# Altium PCB Tarefinha.PcbDoc
Units mil, origin at the board's own origin, x right, y up, seen from the top; angles counter-clockwise.
Board outline 3780 x 3780 mil, 2 copper layers (Top Layer, Bottom Layer); 29 components, 20 nets, 180 pads, 8 vias.
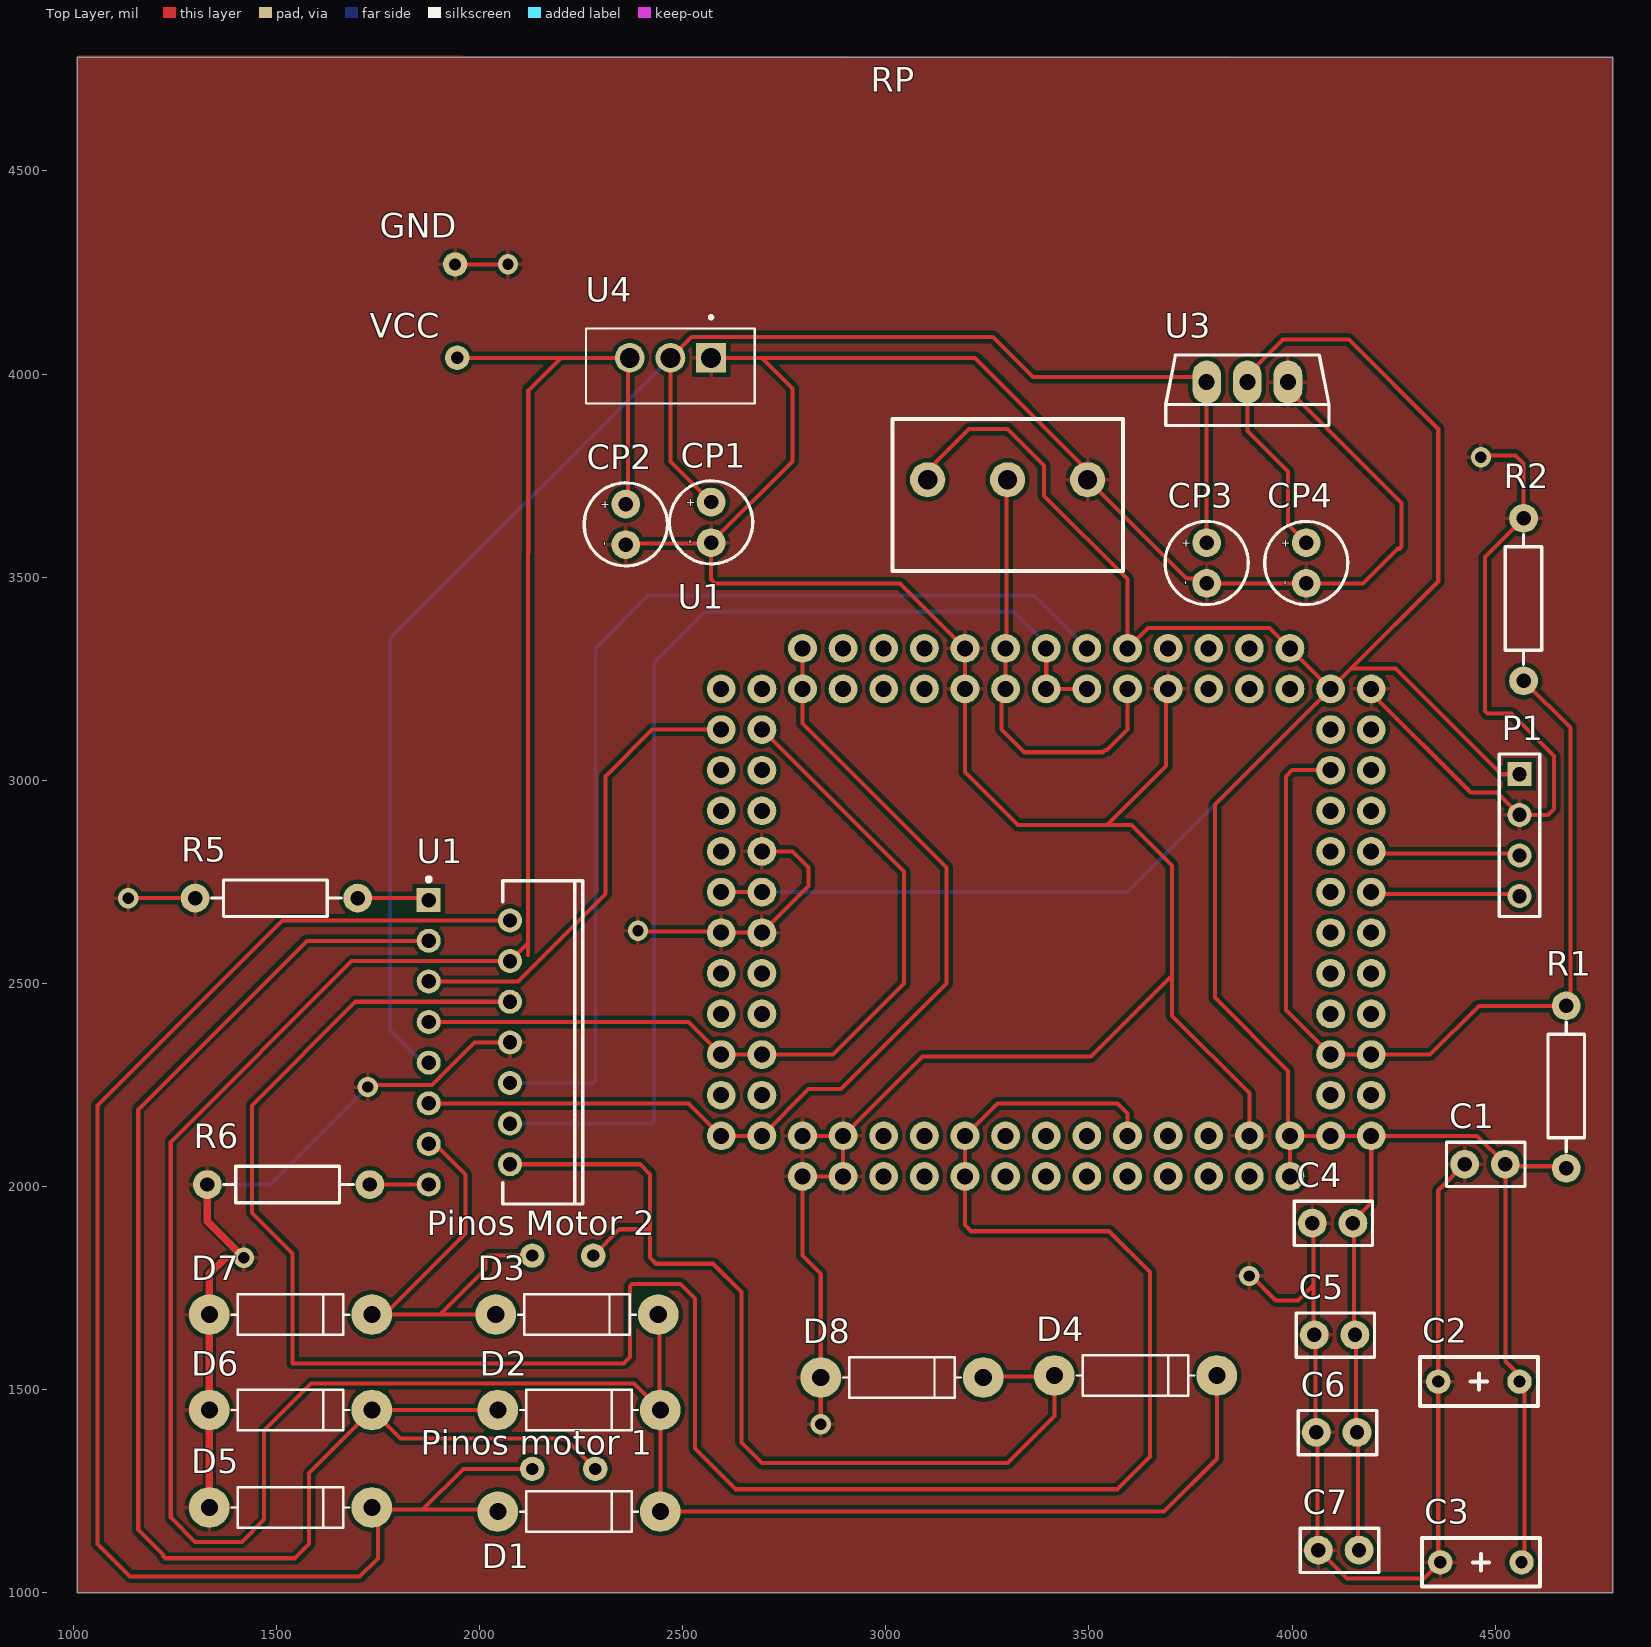
[diagram p0: Top Layer view]
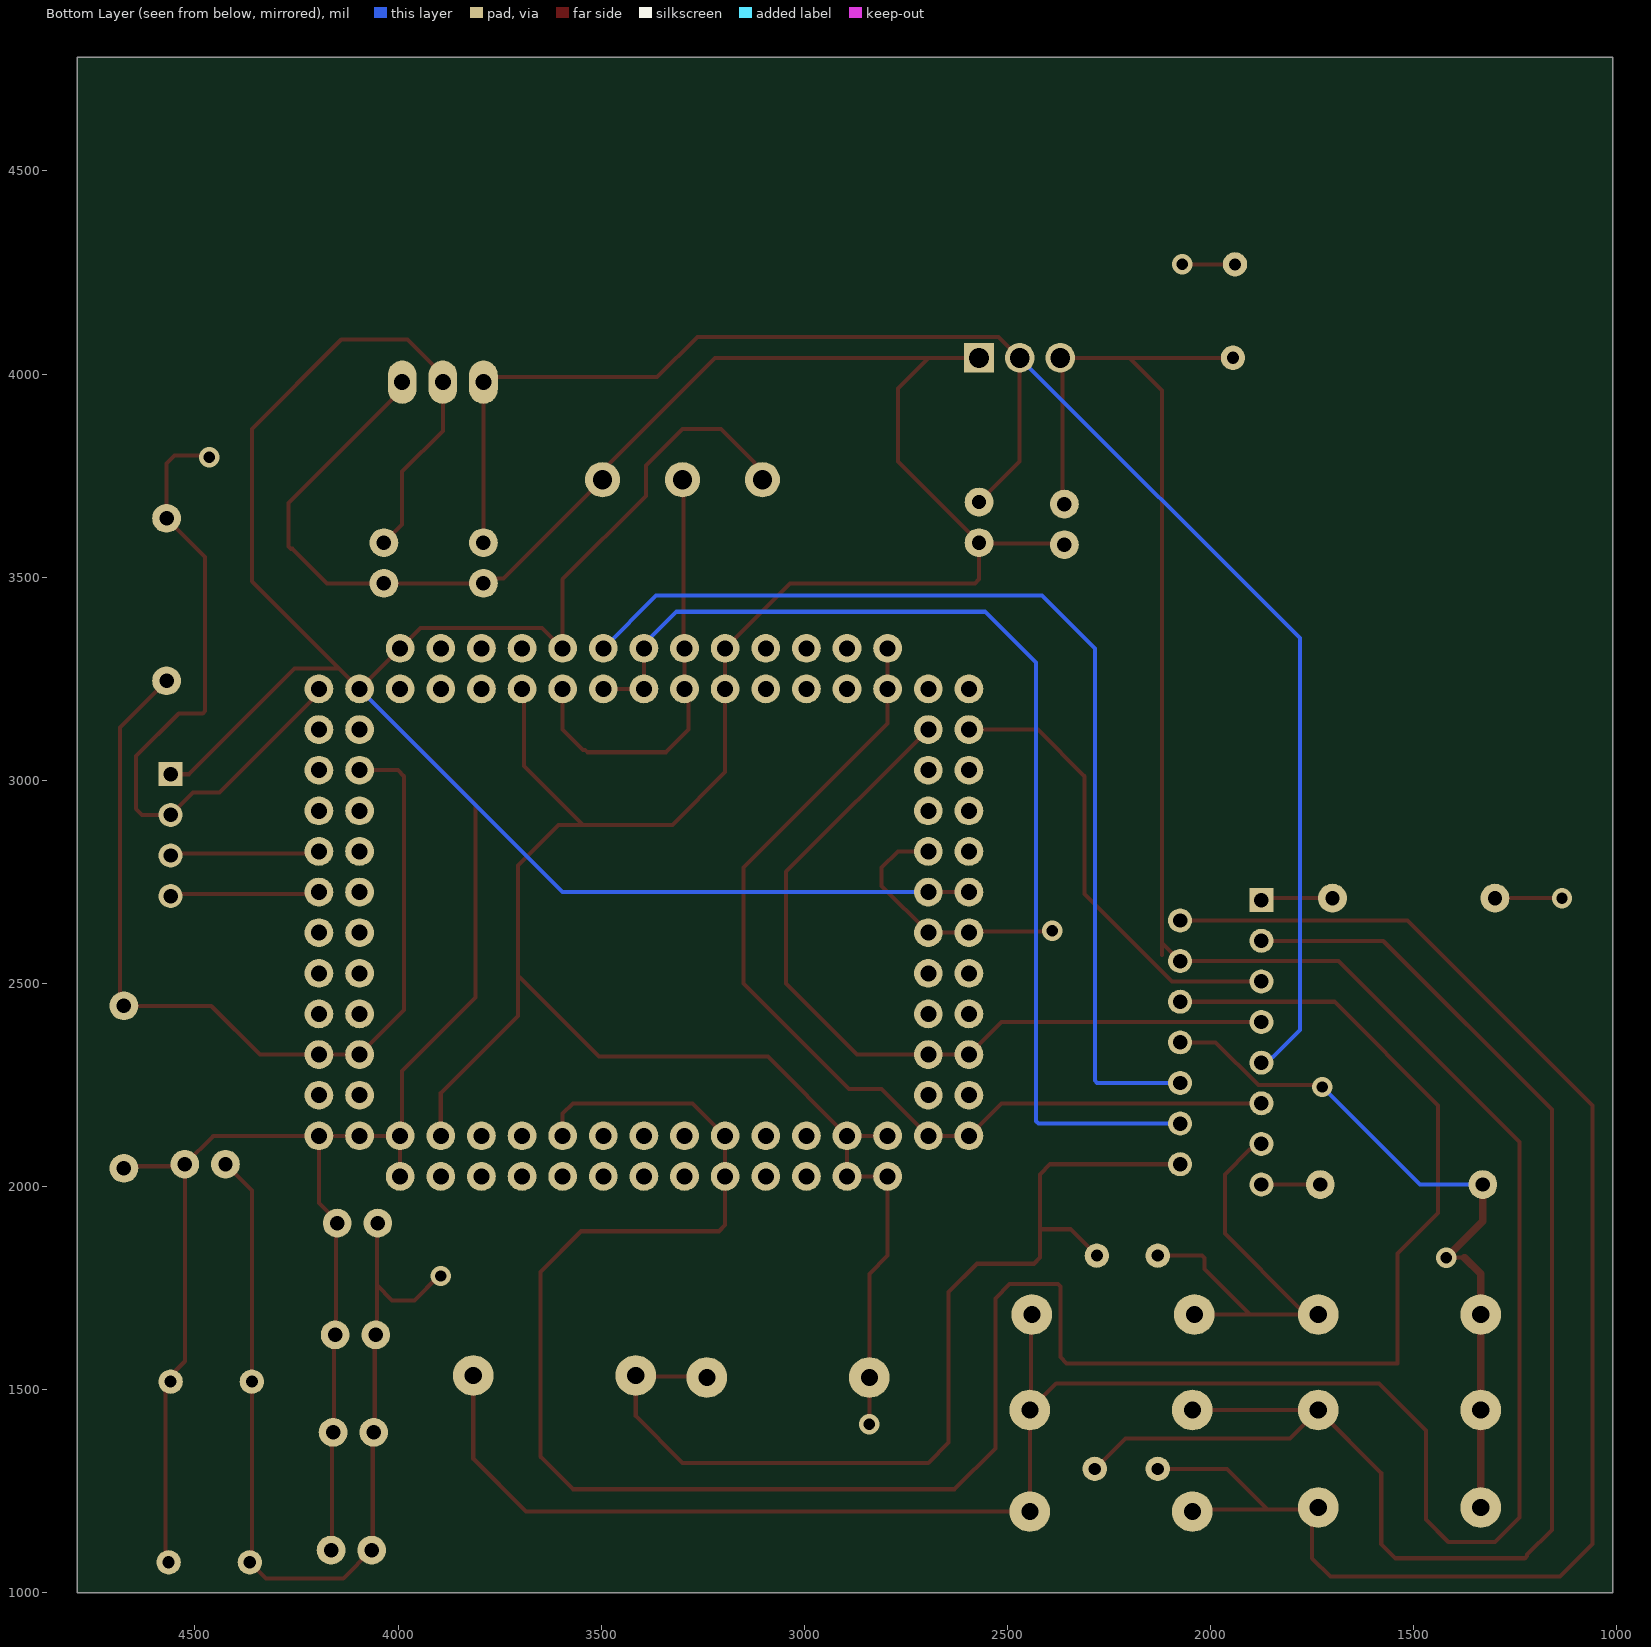
[diagram p1: Bottom Layer view, seen from below]
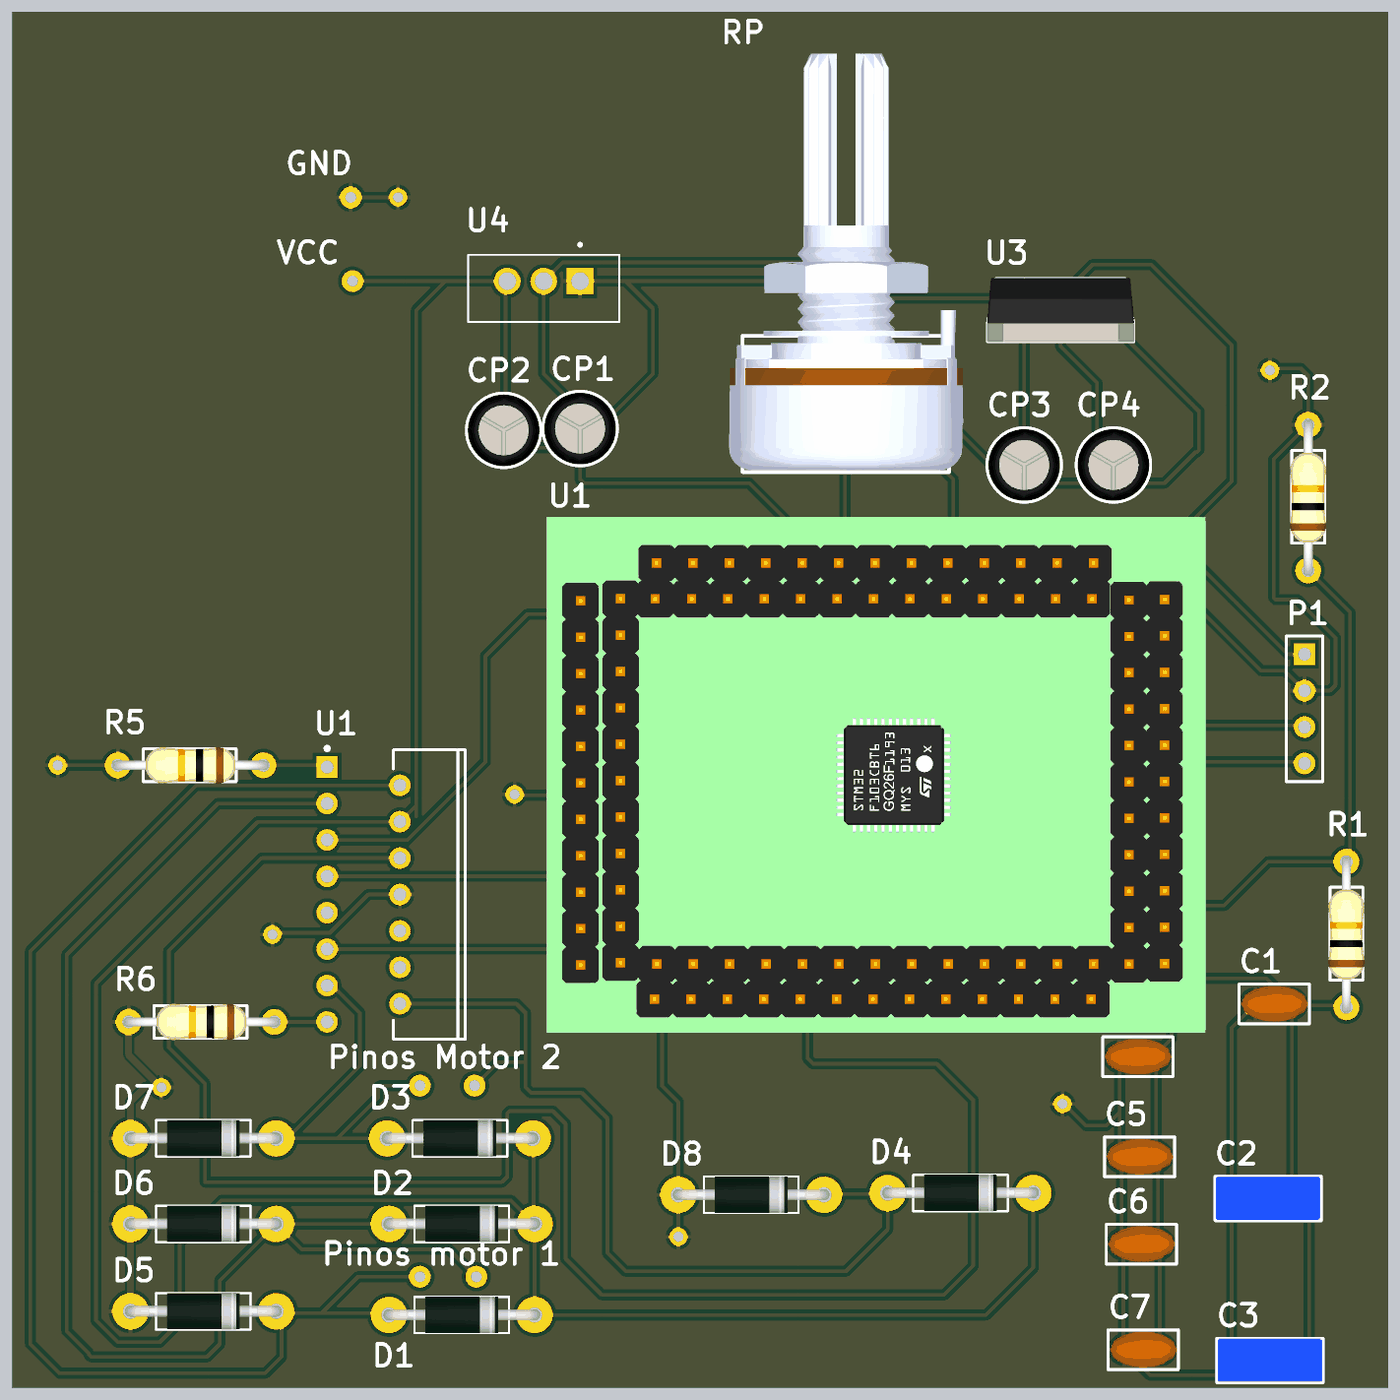
[diagram p2: 3D render of the assembled board from above, using the file's embedded part models]

## Layer stack, top to bottom
Top Solder: solder mask 0.4, Solder Resist, Dk 3.5
Top Layer: signal copper 1.4
Dielectric 1: dielectric 12.6, FR-4, Dk 4.8
Bottom Layer: signal copper 1.4
Bottom Solder: solder mask 0.4, Solder Resist, Dk 3.5

## Board outline
1010,1000 1010,4780 4790,4780 4790,1000

## Design rules (kind name [scope] priority, off if disabled: settings)
Clearance [All] p1: gap=7.87 ignorepadtopadclearanceinfootprint=FALSE except(0: Arc-Hole Track-Hole SMDPad-Hole THPad-Hole Via-Hole Fill-Hole Poly-Hole Region-Hole Text-Hole)
ComponentClearance [All] p1: gap=3.94 collisioncheckmode=3 verticalgap=3.94 showdistances=FALSE
HoleSize [All] p1: absolutevalues=TRUE maxlimit=629.92 minlimit=5.91 maxpercent=80.000 minpercent=20.000
HoleToHoleClearance [All] p1: gap=5 allowstackedmicrovias=TRUE
MinimumAnnularRing [All] p1: minimumring=5.12
MinimumSolderMaskSliver [All] p1: minsoldermaskwidth=5
PolygonConnect [All] p1: connectstyle=Direct reliefconductorwidth=10 reliefentries=4 polygonreliefangle="90 Angle" airgapwidth=10
RoutingVias [All] p1: holewidth=15.75 width=31.5 viastyle="Through Hole" minholewidth=11.81 minwidth=23.62 maxholewidth=19.68 maxwidth=39.37
SilkToSilkClearance [All] p1: silktosilkclearance=0
SilkToSolderMaskClearance [IsPad] p1: minsilkscreentomaskgap=0 clearancetoexposedcopper=TRUE
SolderMaskExpansion [All] p1: expansion=1.5 istentingtop=FALSE
Width [All] p1: maxlimit=39.37 minlimit=11.81 preferedwidth=19.68
24 further rules are at their usual default settings.

## Components (designator, comment, footprint, x,y, rotation, side; value= is the part's Value field where it differs from the comment)
C1 "100nF" "CAP CER DISK 100NF 50V - duplicate" 4475,2055 r0 top
C2 "10 nF" "Cap Film 0.1uF" 4460,1520 r180 top
C3 "1uF" "Cap Film 0.1uF" 4465,1075 r180 top
C4 "4.7uF" "CAP CER DISK 100NF 50V - duplicate" 4100,1910 r0 top
C5 "100nF" "CAP CER DISK 100NF 50V - duplicate" 4105,1635 r0 top
C6 "100nF" "CAP CER DISK 100NF 50V - duplicate" 4110,1395 r0 top
C7 "100nF" "CAP CER DISK 100NF 50V - duplicate" 4115,1105 r0 top
CP1 "10uF" "CAP RAD 10UF 35V" 2570,3635 r270 top
CP2 "10uF" "CAP RAD 10UF 35V" 2360,3630 r270 top
CP3 "10uF" "CAP RAD 10UF 35V" 3790,3535 r270 top
CP4 "10uF" "CAP RAD 10UF 35V" 4035,3535 r270 top
D1 "1n4148" DO-41 2245,1200 r270 top
D2 "1n4148" DO-41 2245,1450 r270 top
D3 "1n4148" DO-41 2240,1685 r270 top
D4 "1n4148" DO-41 3615,1535 r270 top
D5 "1n4148" DO-41 1535,1210 r270 top
D6 "1n4148" DO-41 1535,1450 r270 top
D7 "1n4148" DO-41 1535,1685 r270 top
D8 "1n4148" DO-41 3040,1530 r270 top
P1 "Gravador ST" HDR1X4 4560,3015 r270 top
R1 "0R" "RES 10K 1/4W CARBON FILM" 4675,2245 r90 top
R2 "10K" "RES 10K 1/4W CARBON FILM" 4570,3445 r90 top
R5 "0.5" "RES 10K 1/4W CARBON FILM" 1500,2710 r180 top
R6 "0.5" "RES 10K 1/4W CARBON FILM" 1530,2005 r180 top
RP "Pot 10k" "Pot 10k" 3300,3740 r0 top
U1 "L298N" STM-FM-15 1975,2355 r0 top
U1 "STM32F303CCT6" ADAPTADOR 2795,3225 r270 top
U3 "LM1117-3.3" TO220AB 3890,3980 r180 top
U4 "LM1117I-5.0" TO254P1054X470X1955-3 2470,4040 r180 top

## Footprints (in the part's own frame and the unit in brackets; to place one, negate y for a bottom-side part, rotate by r counter-clockwise, add the part's x,y. Pads: shape width x height; smd on the part's side, far side on the other; paste and mask are expansions set on the pad)
ADAPTADOR [mm] "SMD"
  round 1.8 hole 1: 1(-2.54,30.48) 2(-2.54,2.54) 2(0,30.48) 2(0,2.54) 3(-2.54,27.94) 4(-2.54,5.08) 4(0,27.94) 4(0,5.08) 5(-2.54,25.4) 6(-2.54,7.62) 6(0,25.4) 6(0,7.62) 7(-2.54,22.86) 8(-2.54,10.16) 8(0,22.86) 8(0,10.16) 9(-2.54,20.32) 10(-2.54,12.7) 10(0,20.32) 10(0,12.7) 11(-2.54,17.78) 12(-2.54,15.24) 12(0,17.78) 12(0,15.24) 13(-2.54,0) 13(0,0) 13(27.94,-5.08) 13(27.94,-2.54) 14(0,-5.08) 15(0,-2.54) 15(25.4,-5.08) 15(25.4,-2.54) 16(2.54,-5.08) 17(2.54,-2.54) 17(22.86,-5.08) 17(22.86,-2.54) 18(5.08,-5.08) 19(5.08,-2.54) 19(20.32,-5.08) 19(20.32,-2.54) 20(7.62,-5.08) 21(7.62,-2.54) 21(17.78,-5.08) 21(17.78,-2.54) 22(10.16,-5.08) 23(10.16,-2.54) 23(15.24,-5.08) 23(15.24,-2.54) 24(12.7,-2.54) 24(12.7,-5.08) 25(27.94,15.24) 25(30.48,15.24) 26(30.48,17.78) 27(27.94,17.78) 27(27.94,12.7) 27(30.48,12.7) 28(30.48,20.32) 29(27.94,20.32) 29(27.94,10.16) 29(30.48,10.16) 30(30.48,22.86) 31(27.94,22.86) 31(27.94,7.62) 31(30.48,7.62) 32(30.48,25.4) 33(27.94,25.4) 33(27.94,5.08) 33(30.48,5.08) 34(30.48,27.94) 35(27.94,27.94) 35(27.94,2.54) 35(30.48,2.54) 36(27.94,30.48) 36(30.48,30.48) 37(12.7,35.56) 38(12.7,33.02) 38(15.24,33.02) 38(15.24,35.56) 39(10.16,35.56) 40(10.16,33.02) 40(17.78,33.02) 40(17.78,35.56) 41(7.62,35.56) 42(7.62,33.02) 42(20.32,33.02) 42(20.32,35.56) 43(5.08,35.56) 44(5.08,33.02) 44(22.86,33.02) 44(22.86,35.56) 45(2.54,35.56) 46(2.54,33.02) 46(25.4,33.02) 46(25.4,35.56) 47(0,35.56) 47(27.94,0) 47(30.48,0) 48(0,33.02) 48(27.94,33.02) 48(27.94,35.56)
  body extent -4.24,-8.06 31.76,37.94, height 8.17
"CAP CER DISK 100NF 50V - duplicate" [mm] "Connector; Header; 5 Position"
  round 1.8 hole 0.9: 1(-1.27,0) 2(1.27,0)
  silkscreen extent -2.4,-1.4 2.5,1.37, body extent -2.28,-1.25 2.42,1.25, height 6.1
"Cap Film 0.1uF" [mil] "Cap Film 0.1uF"
  round 60 hole 30: 1(100,0) 2(-100,0)
  silkscreen extent -145,-60 145,60, body extent -144,-60 144,58, height 236
"CAP RAD 10UF 35V" [mm]
  round 1.8 hole 0.9: 1(-1.27,0) 2(1.27,0)
  silkscreen extent -2.6,-2.6 2.6,2.6, body extent -2.5,-2.5 2.5,2.5, height 12.2
DO-41 [mil] "Diode, thru-hole"
  round 100 / inner round 0 / far side round 100 hole 42: 1(0,-200) 2(0,200)
  silkscreen extent -50,-145 50,145, body extent -51,-215 50,215, height 100
HDR1X4 [mm]
  rect 1.5x1.5 hole 0.9: 1(0,0)
  round 1.5 hole 0.9: 2(2.54,0) 3(5.08,0) 4(7.62,0)
  silkscreen extent -1.27,-1.27 8.89,1.27
"Pot 10k" [mm]
  round 2.2 hole 1.2: 1(-5,0) 2(0,0) 3(5,0)
  silkscreen extent -7.2,-5.7 7.2,3.8, body extent -8.15,-5.55 8.19,23.49, height 21.17
"RES 10K 1/4W CARBON FILM" [mm]
  round 1.8 hole 0.9: 1(-5.08,0) 2(5.08,0)
  silkscreen extent -4.06,-1.14 4.06,1.14, body extent -5.47,-1.27 5.47,1.27, height 3.27
STM-FM-15 [mm] "FM, 15-Leads, Body 20.2x5mm, Pitch 1.27mm"
  rect 1.5x1.5 hole 0.9: 1(-2.54,8.89)
  round 1.5 hole 0.9: 2(2.54,7.62) 3(-2.54,6.35) 4(2.54,5.08) 5(-2.54,3.81) 6(2.54,2.54) 7(-2.54,1.27) 8(2.54,0) 9(-2.54,-1.27) 10(2.54,-2.54) 11(-2.54,-3.81) 12(2.54,-5.08) 13(-2.54,-6.35) 14(2.54,-7.62) 15(-2.54,-8.89)
  silkscreen extent -2.66,-10.1 7.09,10.31, body extent -2.8,-10.1 7.09,10.1, height 21
TO220AB [mm]
  oval 1.8x2.7 hole 1: 1(-2.54,0) 2(0,0) 3(2.54,0)
  silkscreen extent -5.1,-1.7 5.1,2.7, body extent -5.15,-1.78 5.15,2.73, height 19.34
TO254P1054X470X1955-3 [mm]
  rect 1.86x1.86 hole 1.24: 1(-2.54,0)
  round 1.86 hole 1.24: 2(0,0) 3(2.54,0)
  silkscreen extent -5.27,-2.64 5.27,2.86

## Part data
C1 C5 C6 C7: library part "Capacitor 100nF - 25V", "CAP CER 0.1UF 25V Y5V 0603", Capacitance=0.1µF, Capacitance Tolerance="+80%, -20%", Capacitor Case Style="0603 ^1608 Metric]", Capacitor Terminals=SMD, Dielectric Characteristic=Y5V, Manufacturer=KEMET, Manufacturer Part Number=C0603C104Z3VACTU, Operating Temperature Range="-30°C to +85°C", Supplier Part Number 1=80-C0603C104Z3V, Voltage Rating=25V, ComponentLink1Description=http://www.farnell.com/datasheets/1470417.pdf, ComponentLink1URL=http://www.farnell.com/datasheets/1470417.pdf, ComponentLink2Description=http://www.farnell.com/datasheets/1828802.pdf, ComponentLink2URL=http://www.farnell.com/datasheets/1828802.pdf, ComponentLink3Description=http://www.alliedelec.com/m/d/9bfe7773041ffe9d406e68bc7b377fdd.pdf, ComponentLink3URL=http://www.alliedelec.com/m/d/9bfe7773041ffe9d406e68bc7b377fdd.pdf, Pricing 1="1=0.1, 10=0.015, 50=0.015, 100=0.011, 1000=0.007, 10000=0.005 (USD)", Stock 1=1512660, Supplier 1=Mouser
C2: library part "Capacitor 10 uF", "MURATA         ZRB18AR61E106ME01L             SMD Multilayer Ceramic Capacitor, 0603 [1608 Metric], 10 F, 25 V,  20%, X5R, ZRA Series", Capacitance=10µF, Manufacturer=Murata, Manufacturer Part Number=ZRB18AR61E106ME01L, Operating Temperature="-55°C ~ 85°C", Package / Case="0603 (1608 Metric)", Ratings=-, Supplier Part Number 1=490-10991-1-ND, Temperature Coefficient=X5R, Tolerance=±20%, Voltage - Rated=25V, Applications="Acoustic Noise Reduction", Category=Capacitors, Family="Ceramic Capacitors", Features="Interposer Termination", Height - Seated (Max)=-, Lead Spacing=-, Lead Style=-, Mounting Type="Surface Mount, MLCC", Packaging="Tape & Reel (TR)", Pricing 1="1=0.63, 10=0.446, 100=0.2934, 500=0.2174, 1000=0.1848 (USD)", Series=ZRB, Size / Dimension="0.063\" L x 0.031\" W (1.60mm x 0.80mm)", Stock 1=30000, Supplier 1=Digi-Key, Thickness (Max)="0.047\" (1.20mm)"
C3: library part "Capacitor 1uF", Manufacturer=Rohm, Manufacturer Part Number=TCM1E105M8R, Supplier Part Number 1=755-TCM1E105M8R, Pricing 1="1=0.39, 10=0.247, 50=0.247, 100=0.106, 1000=0.082, 10000=0.055 (USD)", Stock 1=8000, Supplier 1=Mouser
C4: library part "Capacitor 4.7uF", "CAP CER 4.7UF 35V X5R 0603", Capacitance=4.7µF, Manufacturer=TDK, Manufacturer Part Number=C1608X5R1V475K080AC, Operating Temperature="-55°C ~ 85°C", Package / Case="0603 (1608 Metric)", PCN Part Number="MLCC Part Number Change 30/Nov/2012", Ratings=-, Standard Package=1, Supplier Part Number 1=445-9064-1-ND, Temperature Coefficient=X5R, Tolerance=±10%, Voltage - Rated=35V, Applications="General Purpose", Category=Capacitors, ComponentLink1Description=http://www.mouser.com/ds/2/400/lcc_commercial_general_en-837201.pdf, ComponentLink1URL=http://www.mouser.com/ds/2/400/lcc_commercial_general_en-837201.pdf, Design Resources="20 W Non-Isolated Buck LED Driver Using PL LNK460KG", Family="Ceramic Capacitors", Features=-, Height - Seated (Max)=-, Kits="445-9014-KIT-ND  - KIT MLCC 100PF-22UF 0603 10-50V", Lead Spacing=-, Lead Style=-, Mounting Type="Surface Mount, MLCC", Online Catalog="C Series, General Purpose", Other Names=445-9064-1, Packaging="Cut Tape (CT)", Pricing 1="1=0.6, 10=0.417, 100=0.2501, 500=0.1876, 1000=0.1584 (USD)", Product Training Modules="SEAT, CCV, and TVCL Design Tools Guide to Replacing an Electrolytic Capacitor with an MLCC", RoHS Information="RoHS Certificate-MLCC", Series=C, Size / Dimension="0.063\" L x 0.031\" W (1.60mm x 0.80mm)", Stock 1=382, Supplier 1=Digi-Key, Thickness (Max)="0.039\" (1.00mm)"
CP1 CP2 CP3 CP4: library part "CAP ELE RAD 10uF 16V", "CAP ELE RAD 10uF 16V", Capacitance Tolerance="± 20%", Capacitor Terminals="Radial Leaded", Leakage Current=6, Lifetime @ Temperature="2000 hours @ 85", Manufacturer=-, Manufacturer Part Number=IMP1295, Operating Temperature Max=85, Operating Temperature Min=-40, Operating Temperature Range="-40°C to +85°C<!--FANDB--><div class=\"features-and-benefits-container\"><div class=\"features-and-benefits-description\"><span class=\"features-benefits-value\">The Multicomp MCGPR series capacitors are general purpose, radial leaded polarized aluminium electrolytic capacitors. MCGPR series parts cover broad range of voltage ratings and capacitance values.</span></div><div class=\"features-and-benefits-list\"><ul class=\"features-and-benefits-list-list\"><li class=\"features-and-benefits-list-item\">Capacitance value ranges from 0.1µF to 22000µF for 6.3VDC to 100VDC</li><li class=\"features-and-benefits-list-item\">Capacitance value ranges from 0.47µF to 820µF for 160VDC to 450VDC</li><li class=\"features-and-benefits-list-item\">Tolerance of ±20%</li><li class=\"features-and-benefits-list-item\">Endurance of 2000h at 85°C</li><li class=\"features-and-benefits-list-item\">Available in -40°C to 85°C and -25°C to 85", Supplier Part Number 1="Capacitor Eletrolítico 10uF/16V", Voltage Rating=16, Capacitance=10uF, Capacitance Tolerance ±="± 20%", ComponentLink1Description=http://loja.multcomercial.com.br/capacitor-eletrolitico-10uf-16v.html, ComponentLink1URL=http://loja.multcomercial.com.br/capacitor-eletrolitico-10uf-16v.html, Diameter=5, ESR=-, Height=11, Lead Spacing=2, Packaging=Each, Pricing 1="1=0.50 (BRL)", Product Range="MCGPR Series", RoHS=YES, Stock 1=33826, Supplier 1="Mult Comercial", SVHC="No SVHC (15-Jun-2015)"
D1 D2 D3 D4 D5 D6 D7 D8: "DIODE GEN PURP 75V 2A SOD123", Capacitance @ Vr, F="4pF @ 0V, 1MHz", Current - Average Rectified (Io)=150mA, Current - Reverse Leakage @ Vr="100µA @ 100V", Manufacturer="Vishay Semiconductor Diodes Division", Manufacturer Part Number=1N4148W-E3-08, Operating Temperature - Junction="150°C (Max)", Package / Case=SOD-123, Supplier Part Number 1=1N4148W-E3-08CT-ND, Voltage - DC Reverse (Vr) (Max)=75V, Voltage - Forward (Vf) (Max) @ If="1.2V @ 100mA", Category="Discrete Semiconductor Products", ComponentLink1Description=http://www.vishay.com/docs/85748/1n4148w.pdf, ComponentLink1URL=http://www.vishay.com/docs/85748/1n4148w.pdf, Diode Type=Standard, Mounting Type="Surface Mount", Packaging="Cut Tape (CT)", Part Status=Active, Pricing 1="1=0.23, 10=0.188, 25=0.1576, 100=0.0998, 250=0.07704, 500=0.06566, 1000=0.04465 (USD)", Reverse Recovery Time (trr)=4ns, RoHS="RoHS Compliant", Speed="Small Signal =< 200mA (Io), Any Speed", Stock 1=32600, Supplier 1=Digi-Key, Supplier Device Package=SOD-123
P1: "Headers & Wire Housings 40Pin 2mm Spacing Single Row Hdrs, 5pc", Manufacturer=Cromax, Manufacturer Part Number=IMP10327, Supplier Part Number 1="Barra de Pinos Simples 1x40 Macho BMO40-1E", Accessory Type=-, Brand=Cromax, Category="Headers & Wire Housings", ComponentLink1Description=http://loja.multcomercial.com.br/barra-de-pinos-simples-1x40-macho-bmo40-1e.html, ComponentLink1URL=http://loja.multcomercial.com.br/barra-de-pinos-simples-1x40-macho-bmo40-1e.html, Contact Gender="Pin (Male)", Contact Plating=Gold, Contact Type=-, Minimum Order Quantity=1, Mounting Angle=Vertical, Mounting Style="Straight Pin", Number of Positions="40 Position", Number of Rows="1 Row", Pitch="2 mm", Pricing 1="1=1.00, 5=0.20 (BRL)", Product=Headers, Product Category=Accessories, Reeling=False, RoHS="RoHS Compliant", RoHS - Mouser=Y, Row Spacing=-, Stock 1=14, Supplier 1="Mult Comercial", Termination Style="Through Hole", Type=Breakaway
R1 R5 R6: library part "RES 0R 0603", "Res Thick Film 0603 0 Ohm Molded SMD Automotive T/R", Manufacturer="Panasonic ECG", Manufacturer Part Number=ERJ-3GEY0R00V, Operating Temperature="-55°C ~ 155°C", Package / Case="0603 (1608 Metric)", Power (Watts)="0.1W, 1/10W", Resistance (Ohms)=0.0, Standard Package=1, Supplier Device Package=0603, Supplier Part Number 1=667-ERJ-3GEY0R00V, Temperature Coefficient=-, Tolerance=Jumper, Category=Resistors, ComponentLink1Description=https://datasheet.ciiva.com/48532/aoa0000ce1-48532165.pdf, ComponentLink1URL=https://datasheet.ciiva.com/48532/aoa0000ce1-48532165.pdf, ComponentLink2Description=https://datasheet.ciiva.com/43460/1678796-43460647.pdf, ComponentLink2URL=https://datasheet.ciiva.com/43460/1678796-43460647.pdf, ComponentLink3Description=https://datasheet.ciiva.com/27055/1935748-27055113.pdf, ComponentLink3URL=https://datasheet.ciiva.com/27055/1935748-27055113.pdf, ComponentLink4Description=https://datasheet.ciiva.com/28695/1678796-28695833.pdf, ComponentLink4URL=https://datasheet.ciiva.com/28695/1678796-28695833.pdf, ComponentLink5Description=https://datasheet.ciiva.com/5959/1678796-5959707.pdf, ComponentLink5URL=https://datasheet.ciiva.com/5959/1678796-5959707.pdf, ComponentLink6Description=https://datasheet.ciiva.com/16834/aoa0000ce1-16834828.pdf, ComponentLink6URL=https://datasheet.ciiva.com/16834/aoa0000ce1-16834828.pdf, ComponentLink7Description=https://datasheet.ciiva.com/17215/aoa0000ce1-17215388.pdf, ComponentLink7URL=https://datasheet.ciiva.com/17215/aoa0000ce1-17215388.pdf, ComponentLink8Description=https://datasheet.ciiva.com/46377/1678796-46377868.pdf, ComponentLink8URL=https://datasheet.ciiva.com/46377/1678796-46377868.pdf, ComponentLink9Description=https://datasheet.ciiva.com/30199/4aoa0000ce1-30199822.pdf, ComponentLink9URL=https://datasheet.ciiva.com/30199/4aoa0000ce1-30199822.pdf, ComponentLink10Description=https://datasheet.ciiva.com/9198/aoa0000ce1-9198975.pdf, ComponentLink10URL=https://datasheet.ciiva.com/9198/aoa0000ce1-9198975.pdf, ComponentLink11Description=https://datasheet.ciiva.com/11808/0900766b80f806dd-11808207.pdf, ComponentLink11URL=https://datasheet.ciiva.com/11808/0900766b80f806dd-11808207.pdf, ComponentLink12Description=https://datasheet.ciiva.com/16758/70255313-16758527.pdf, ComponentLink12URL=https://datasheet.ciiva.com/16758/70255313-16758527.pdf, Composition="Thick Film", EDA / CAD Models="Download from Accelerated Designs", Family="Chip Resistor - Surface Mount", Features="Automotive AEC-Q200", Height="0.022\" (0.55mm)", Number of Terminations=2, Online Catalog="ERJ Series", Other Names=P0.0GDKR, Packaging=Digi-Reel®, Pricing 1="1=0.1, 10=0.012, 50=0.012, 100=0.008, 1000=0.003, 10000=0.002 (USD)", Series=ERJ, Size / Dimension="0.063\" L x 0.031\" W (1.60mm x 0.80mm)", Stock 1=0, Supplier 1=Mouser
R2: library part "RES 10K 0603", "Res Thick Film 0603 10K Ohm 1% 0.1W(1/10W) ±100ppm/C Molded SMD Automotive T/R", Manufacturer="Panasonic ECG", Manufacturer Part Number=ERJ-3EKF1002V, Rated Power="0.1 W", Supplier Part Number 1=667-ERJ-3EKF1002V, Temp Coefficient="100 ppm/C", Tolerance (%)="1 %", ComponentLink1Description=https://datasheet.ciiva.com/16511/aoa0000ce2-16511861.pdf, ComponentLink1URL=https://datasheet.ciiva.com/16511/aoa0000ce2-16511861.pdf, ComponentLink2Description=https://datasheet.ciiva.com/46372/1678782-46372725.pdf, ComponentLink2URL=https://datasheet.ciiva.com/46372/1678782-46372725.pdf, ComponentLink3Description=https://datasheet.ciiva.com/28514/426256-28514198.pdf, ComponentLink3URL=https://datasheet.ciiva.com/28514/426256-28514198.pdf, ComponentLink4Description=https://datasheet.ciiva.com/9194/aoa0000ce2-9194199.pdf, ComponentLink4URL=https://datasheet.ciiva.com/9194/aoa0000ce2-9194199.pdf, ComponentLink5Description=https://datasheet.ciiva.com/7830/aoa0000ce2-7830729.pdf, ComponentLink5URL=https://datasheet.ciiva.com/7830/aoa0000ce2-7830729.pdf, ComponentLink6Description=https://datasheet.ciiva.com/17212/aoa0000ce2-17212105.pdf, ComponentLink6URL=https://datasheet.ciiva.com/17212/aoa0000ce2-17212105.pdf, ComponentLink7Description=https://datasheet.ciiva.com/30208/aoa0000ce2-30208985.pdf, ComponentLink7URL=https://datasheet.ciiva.com/30208/aoa0000ce2-30208985.pdf, ComponentLink8Description=https://datasheet.ciiva.com/48530/aoa0000ce2-48530988.pdf, ComponentLink8URL=https://datasheet.ciiva.com/48530/aoa0000ce2-48530988.pdf, ComponentLink9Description=https://datasheet.ciiva.com/24070/aoa0000ce2-24070318.pdf, ComponentLink9URL=https://datasheet.ciiva.com/24070/aoa0000ce2-24070318.pdf, ComponentLink10Description=https://datasheet.ciiva.com/16759/70260748-16759807.pdf, ComponentLink10URL=https://datasheet.ciiva.com/16759/70260748-16759807.pdf, Pricing 1="1=0.15, 10=0.014, 50=0.014, 100=0.006, 1000=0.004, 10000=0.002 (USD)", Resistance=10K, Size Code=0603, Stock 1=79504, Supplier 1=Mouser
RP: "POT 10K OHM 1/20W PLASTIC LINEAR", Manufacturer="TT Electronics/BI", Manufacturer Part Number=P120PK-Y25BR10K, Power (Watts)="0.05W, 1/20W", Resistance (Ohms)=10k, Resistive Material="Conductive Plastic", Supplier Part Number 1=987-1710-ND, Temperature Coefficient=-, Tolerance=±20%, Actuator Diameter="0.236\" (6.00mm)", Actuator Length="0.984\" (25.00mm)", Actuator Type=Knurled, Adjustment Type="Top Adjustment", Built in Switch=None, Bushing Thread=-, Category="Potentiometers, Variable Resistors", ComponentLink1Description=http://www.ttelectronics.com/sites/default/files/download-files/Datasheet_RotaryPanelPot_P120series.pdf, ComponentLink1URL=http://www.ttelectronics.com/sites/default/files/download-files/Datasheet_RotaryPanelPot_P120series.pdf, Mounting Type="Through Hole, Snap In", Number of Turns=1, Packaging=Tray, Part Status=Active, Pricing 1="1=0.6, 10=0.553, 25=0.4932, 50=0.476, 100=0.442, 250=0.43352, 500=0.3995, 1000=0.34, 5000=0.2805 (USD)", RoHS="RoHS Compliant", Rotation=300°, Stock 1=1210, Supplier 1=Digi-Key, Taper=Linear, Termination Style="PC Pins, Board Locks"
U1: library part STM-L298-15, "IC BRIDGE DRIVER PAR 15MULTIWATT"
U1: "STMICROELECTRONICS         STM32F303CCT6             32 Bit Microcontroller, General Purpose, ARM Cortex-M4, 72 MHz, 256 KB, 40 KB, 48 Pins, LQFP", Manufacturer=STMicroelectronics, Operating Temperature="-40°C ~ 85°C", Package / Case=48-LQFP, Standard Package=250, Supplier Part Number 1=511-STM32F303CCT6, Voltage - Supply (Vcc/Vdd)="2 V ~ 3.6 V", Category="Integrated Circuits (ICs)", ComponentLink1Description=https://datasheet.ciiva.com/14666/0900766b81171360-14666656.pdf, ComponentLink1URL=https://datasheet.ciiva.com/14666/0900766b81171360-14666656.pdf, ComponentLink2Description=https://datasheet.ciiva.com/8055/1831499-8055015.pdf, ComponentLink2URL=https://datasheet.ciiva.com/8055/1831499-8055015.pdf, Connectivity="CAN, I²C, IrDA, LIN, SPI, UART/USART, USB", Core Processor="ARM® Cortex™-M4", Core Size=32-Bit, Data Converters="A/D 4x12b; D/A 2x12b", Dynamic Catalog="STM32 F3 Series", Family="Embedded - Microcontrollers", Manufacturer Part Number=STM32F303CCT6, Number of I /O=37, Oscillator Type=Internal, Other Names=497-13318, Other Related Documents="STM32F303CC View All Specifications", Packaging=Tray, Peripherals="DMA, I²S, POR, PWM, WDT", Pricing 1="1=5.94, 10=5.05, 50=5.05, 100=4.38, 1000=3.14, 10000=2.99 (USD)", Program Memory Size="256KB (256K x 8)", Program Memory Type=FLASH, RAM Size="48K x 8", Series="STM32 F3", Speed=72MHz, Stock 1=0, Supplier 1=Mouser
U3: "IC REG LDO 3.3V 0.8A SOT223", Dropout Voltage@Current (Max)=1.3@100mA/1.35@500mA, Dropout Voltage@Current (Typ)=1.1@100mA/1.15@500mA, Input Voltage=15V, Manufacturer="Texas Instruments (TI)", Manufacturer Part Number=LM1117IMPX-3.3/NOPB, Operating Temp Range="-40C to 125C", Operating Temperature Classification=Automotive, Output Current=800mA, Output Voltage=3.3V, Output Voltage Accuracy=±1%, Package Type=SOT-223, Quiescent Current (Max)=15mA, Supplier Part Number 1=LM1117IMPX-3.3/NOPBDKR-ND, Voltage Regulator Type=LDO, ComponentLink1Description=https://datasheet.ciiva.com/49047/1882372-49047126.pdf, ComponentLink1URL=https://datasheet.ciiva.com/49047/1882372-49047126.pdf, ComponentLink2Description=https://datasheet.ciiva.com/46386/1882372-46386044.pdf, ComponentLink2URL=https://datasheet.ciiva.com/46386/1882372-46386044.pdf, Line Regulation=1mV, Load Regulation=1mV, Mounting="Surface Mount", Number of Outputs=1, Packaging="Tape and Reel", Pin Count="3 +Tab", Polarity Type=Positive, Pricing 1="1=1.04, 10=0.927, 100=0.7229, 500=0.5978, 1000=0.4728 (USD)", Regulator Output Type=Fixed, Stock 1=30275, Supplier 1=Digikey, Topology=LDO
U4: "5V LDO Voltage Regulator 800mA", Case/Package=SOT, Dropout Voltage=1.2V, Manufacturer="Texas Instruments", Manufacturer Part Number=LM1117IMPX-5.0/NOPB, Output Current=800mA, Output Voltage=5V, Quiescent Current=5mA, Supplier Part Number 1=926-LM1117IMPX50NOPB, ComponentLink1Description=Datasheet, ComponentLink1URL=http://www.ti.com/lit/ds/symlink/lm1117.pdf?HQS=TI-null-null-mousermode-df-pf-null-wwe&DCM=yes&ref_url=https%3A%2F%2Fbr.mouser.com%2F, ComponentLink2Description=Mouser, ComponentLink2URL=https://br.mouser.com/ProductDetail/Texas-Instruments/LM1117IMPX-50-NOPB?qs=sGAEpiMZZMsGz1a6aV8DcCERHZHPu4lvRjG0WFCuZBk%3D, Lead Free="Lead Free", Number of Pins=3, Packaging="Tape and Reel", REACH SVHC="No SVHC", Supplier 1=Mouser

## Free pads (board coordinates)
  round 60 hole 30: 3(1945,4040) 4(1940,4270) Motor2(2130,1830) motor2(2280,1830) "motor 1"(2130,1305) "motor 1"(2285,1305)

## Via types
v1: diameter 50, hole 28, Top Layer to Bottom Layer, 8 vias

## Nets (pads, with @x,y where several pads share a name; then routed paths per layer and width w, separated by ;. In a path a pad name is that pad's centre, name@x,y a point inside that pad or via, vN(x,y) a via of type N, cw(c..) or ccw(c..) an arc to the next point about the centre after c; other vN are vias at no path point)
3V3: C1.2 C2.2 C3.2 C4.2 C5.2 C6.2 C7.2 CP4.1 P1.1 R1.1 RP.1 U1.1@3995,3325 U1.9@3595,3325 U1.24 U1.36 U1.48 U3.2 | length 9742.4
  Top Layer w10: U1.24@2590,2730 2595,2725 2695,2725 U1.24@2705,2725 ; RP.1 3103.15,3760.73 3122.8,3780.39 3122.8,3782.8 3205,3865 3300,3865 3390,3775 3390,3700 3595,3495 3595,3325 3645.43,3375.43 3944.57,3375.43 3995,3325 U1.48@4095,3225 ; U1.36@3995,2025 U1.36@3995,2125 ; CP4.1 3990,3630 3990,3760 3890,3860 U3.2 3890,3997.72 3977.28,4085 4140,4085 4360,3865 4360,3490 4145.43,3275.43 ; C7.2 4162.5,1107.5 4162.5,1392.5 C6.2 4157.5,1397.5 4157.5,1632.5 C5.2 4152.5,1637.5 4152.5,1907.5 C4.2 4150,1914.62 4195,1959.62 U1.48@4195,2125 ; P1.1 4515,3015 4254.57,3275.43 4145.43,3275.43 ; C3.2@4575,1075 4572.5,1077.5 4572.5,1522.5 4525,1570 C1.2 ; R1.1@4675,2030 R1.1 4670,2050 4530,2050 C1.2 ; U1.36@3995,2125 3990,2130 3990,2285 3810,2465 3810,2940 U1.48@4095,3225 ; U1.36@3995,2125 4095,2125 U1.48@4195,2125 ; U1.48@4095,3225 4145.43,3275.43 ; U1.48@4195,2125 4455,2125 C1.2
  Bottom Layer w10: U1.24@2695,2725 3595,2725 U1.48@4095,3225
5V: CP1.1 CP3.1 U1.9@1875,2305 U3.3 U4.2 | length 4247.8
  Top Layer w10: CP1.1@2570,3685.17 2470,3785.17 U4.2 2521.61,4091.61 3263.39,4091.61 3362.28,3992.72 3777.28,3992.72 U3.3 CP3.1
  Bottom Layer w10: U1.9@1875,2305 1861.73,2305 1847.74,2318.99 1846.01,2318.99 1780,2385 1780,3350 U4.2
BOOT0: R1.2 R2.1 U1.44 | length 2328.3
  Top Layer w10: U1.44@4095,3025 4000,3025 3985,3010 3985,2435 4095,2325 4195,2325 4340,2325 4460,2445 R1.2 4685,2455 4685,3130 R2.1
"DUAL 1": "pad.motor 1"@2130,1305 D1.1 D5.2 U1.2@2075,2655 | length 3774.9
  Top Layer w10: D5.2 D5.2@1740,1205 ; D1.1 2040,1205 1860,1205 ; U1.2@2075,2655 1515,2655 1060,2200 1060,1120 1140,1040 1705,1040 1750,1085 1750,1195 D5.2@1740,1205 ; 2130,1305 1960,1305 1860,1205 ; D5.2@1740,1205 1860,1205
"DUAL 2": "pad.motor 1"@2285,1305 D2.1 D6.2 U1.3@1875,2605 | length 3701.6
  Top Layer w10: U1.3@1875,2605 1575,2605 1160,2190 1160,1155 1220.86,1094.14 1220.86,1090.86 1226.72,1085 1545,1085 1580,1120 1580,1295 D6.2 ; D2.1 D6.2 ; 2285,1305 2210,1380 1805,1380 D6.2
"DUAL 3": D3.1 D7.2 pad.Motor2 U1.13@1875,2105 | length 1160.4
  Top Layer w10: D7.2 D7.2@1765.86,1685 ; U1.13@1875,2105 1888.27,2105 1902.26,2091.01 1903.99,2091.01 1965,2030 1965,1884.14 1783.08,1702.22 1776.57,1702.22 1765.86,1691.5 D7.2@1765.86,1685 ; D3.1 1902.93,1685 ; pad.Motor2 2020.86,1830 2015,1824.14 2015,1797.07 1902.93,1685 ; D7.2@1765.86,1685 1902.93,1685
"DUAL 4": D4.1 D8.2 pad.motor2 U1.14@2075,2055 | length 2472.9
  Top Layer w10: U1.14@2075,2055 2395,2055 2420,2030 2420,1895 ; pad.motor2 2345,1895 2420,1895 ; D8.2 3242.5,1532.5 3412.5,1532.5 D4.1 3415,1435 3300,1320 2695,1320 2645,1370 2645,1740 2575,1810 2435,1810 2420,1825 2420,1895
"Enable 1": U1.6@2075,2455 U1.29 | length 5845
  Top Layer w10: U1.6@2075,2455 1695,2455 1440,2200 1440,1935 1540,1835 1540,1565 2355,1565 2370,1580 2370,1754.14 2375.86,1760 2495,1760 2530,1725 2530,1355 2630,1255 3570,1255 3650,1335 3650,1790 3550,1890 3210,1890 3195,1905 3195,2025 3195,2125 3275,2205 3570,2205 3595,2180 U1.29@3595,2125
"Enable 2": U1.11@1875,2205 U1.13@2595,2125 U1.13@2695,2125 U1.13@2795,3225 U1.13@2795,3325 | length 2435.5
  Top Layer w10: U1.11@1875,2205 2515,2205 2595,2125 2695,2125 2810,2240 2890,2240 3150,2500 3150,2785 2795,3140 2795,3225 U1.13@2795,3325
GND: C1.1 C2.1 C3.1 C4.1 C5.1 C6.1 C7.1 CP1.2 CP2.2 CP3.2 CP4.2 D5.1 D6.1 D7.1 D8.1 P1.2 pad.4 R2.2 R5.2 R6.2 RP.3 U1.8 U1.23 U1.35 U1.47 U3.1 U4.1 | length 14815.9
  Top Layer w10: v1(1135,2710) R5.2 ; R6.2 R6.2@1332.5,2002.5 ; 1375,1825 v1(1420,1825) ; v1(1725,2245) 1729.53,2249.53 1882.5,2249.53 1987.97,2355 U1.8@2075,2355 ; pad.4 v1(2070,4270) ; CP2.2 2362.5,3582.5 CP1.2@2570.01,3582.5 ; v1(2390,2630) 2392.5,2627.5 2592.5,2627.5 2595,2625 2695,2625 2810,2740 2810,2785 2770,2825 U1.23@2695,2825 ; U4.1 2695,4040 ; U1.47@2795,2125 U1.35@2895,2125 ; v1(2840,1415) 2840,1785 2795,1830 2795,2025 2895,2025 U1.35@2895,2125 ; U1.8@3695,3225 3690,3220 3690,3035 3545,2890 ; v1(3895,1780) 3900,1780 3960,1720 4015,1720 4052.5,1757.5 ; U1.35@3895,2125 3895,2230 3705,2420 3705,2515 ; U3.1 3990,3962.28 4270,3682.28 4270,3575.86 4264.14,3570 4260,3570 4175,3485 CP4.2 CP3.2 3778.36,3496.65 3740.2,3496.65 RP.3 3496.85,3763.15 3494.43,3763.15 3482.19,3775.39 3482.19,3777.81 3220,4040 2695,4040 ; C4.1 4052.5,1907.5 4052.5,1757.5 ; U1.47@4195,3225 4195,3215 4440,2970 4505,2970 P1.2 4630,2915 4645,2930 4645,3060 4540,3165 4480.86,3165 4475,3170.86 4475,3550 R2.2 4570,3780 4550,3800 4470,3800 v1(4465,3795) ; C3.1 4325,1035 4135,1035 C7.1 4062.5,1107.5 4062.5,1392.5 C6.1 4057.5,1397.5 4057.5,1632.5 C5.1 4052.5,1637.5 4052.5,1757.5 ; C3.1@4375,1075 4375,1088.53 4360,1103.53 C2.1 4360,1990 C1.1 ; CP1.2@2570.01,3582.5 CP1.2 2770,3784.99 2770,3965 2695,4040 ; CP1.2@2570.01,3582.5 2570.01,3494.99 2580,3485 3035,3485 3195,3325 3195,3225 3195,3020 3325,2890 3545,2890 ; U1.35@2895,2125 3090,2320 3505,2320 3700,2515 3705,2515 ; 3545,2890 3605,2890 3705,2790 3705,2515
  Top Layer w19: R6.2 1330,1915 v1(1420,1825) ; D5.1 D6.1 D7.1 1335,1785 1375,1825
  Bottom Layer w10: R6.2 1485,2005 v1(1725,2245)
"output A": U1.5@1875,2505 U1.16 | length 1146.7
  Top Layer w10: U1.5@1875,2505 2095,2505 2310,2720 2310,3010 2425,3125 U1.16
"output B": U1.7@1875,2405 U1.17 | length 2045.6
  Top Layer w10: U1.7@1875,2405 2515,2405 2595,2325 2695,2325 2870,2325 3045,2500 3045,2775 U1.17@2695,3125
"output C": U1.10@2075,2255 U1.11@3495,3325 | length 2608.4
  Top Layer w10: U1.10@2075,2255 U1.10@2082.5,2262.5 ; U1.11@3495,3325 U1.11@3497.5,3327.5
  Bottom Layer w10: U1.10@2075,2255 2279.14,2255 2285,2260.86 2285,3325 2415,3455 3365,3455 U1.11@3495,3325
"output D": U1.12 | length 2746.5
  Top Layer w10: U1.12@3395,3325 3395,3225 U1.12@3495,3225
  Bottom Layer w10: U1.12@2075,2155 2424.14,2155 2430,2160.86 2430,3290 2555,3415 3315,3415 3395,3335 U1.12@3395,3325
Pot: RP.2 U1.10@3295,3225 U1.10@3295,3325 U1.10@3595,3225 | length 1107.5
  Top Layer w10: RP.2@3300,3770 3297.5,3767.5 3297.5,3327.5 3295,3325 3295,3225 3285,3215 3285,3125 3340.86,3069.14 3534.14,3069.14 3540,3075 3545,3075 3595,3125 U1.10@3595,3225
"sense A": R5.1 U1.1@1875,2705 | length 177.1
  Top Layer w10: R5.1 1870,2710 U1.1@1875,2705
"sense B": R6.1 U1.15@1875,2005 | length 160
  Top Layer w10: R6.1@1715,2005 U1.15@1875,2005
SWCLK: P1.4 U1.37 | length 369.1
  Top Layer w10: U1.37 4200,2720 4555,2720 P1.4
SWDIO: P1.3 U1.39 | length 369.1
  Top Layer w10: U1.39 4200,2820 4555,2820 P1.3
VCC: CP2.1 D1.2 D2.2 D3.2 D4.2 pad.3 U1.4@2075,2555 U4.3 | length 7960.8
  Top Layer w10: pad.3 2200,4040 ; 2119.53,2569.53 2119.53,2599.53 ; CP2.1 2365,3685 2365,4035 U4.3 2200,4040 ; D3.2 2442.5,1682.5 D2.2@2442.5,1452.5 ; D4.2 3815,1330 3685,1200 D1.2 D2.2 D2.2@2442.5,1452.5 ; 2119.53,2599.53 2119.53,3560.47 2120,3560 2120,3960 2200,4040 ; 2119.53,2599.53 2075,2555 1685,2555 1240,2110 1240,1185 1300,1125 1415,1125 1470,1180 1470,1400 1585,1515 2380,1515 D2.2@2442.5,1452.5
pads on no net: U1.2@2895,3225 U1.2@2895,3325 U1.2@3995,3225 U1.3@3895,3325 U1.4@2995,3225 U1.4@2995,3325 U1.4@3895,3225 U1.5@3795,3325 U1.6@3095,3225 U1.6@3095,3325 U1.6@3795,3225 U1.7@3695,3325 U1.14@2595,3225 U1.15@2595,2225 U1.15@2695,2225 U1.15@2695,3225 U1.18 U1.19 U1.20 U1.21 U1.22 U1.25 U1.26 U1.27 U1.28 U1.30 U1.31 U1.32 U1.33 U1.34 U1.38 U1.40 U1.41 U1.42 U1.43 U1.45 U1.46

## Polygon pours and split planes (outlines as drawn)
GND on Top Layer "GND_L01_P001" (solid, pour order 1): 4790,1000 1005,1000 1010,1005 1010,4784.99 4790,4780

## Silkscreen, mask and mechanical layers (free items; w line width, h text height)
Top Overlay:
  text "GND" at 1755,4335 h60
  text "VCC" at 1730,4090 h60
  text "Pinos Motor 2" at 1870,1880 h60
  text "Pinos motor 1" at 1855,1340 h60

## Text inside footprints (layer, text, board x,y; h text height)
C1: Mechanical 29 "1" at 4459.25,2011.69 h19.68
C4: Mechanical 29 "1" at 4084.25,1866.69 h19.68
C5: Mechanical 29 "1" at 4089.25,1591.69 h19.68
C6: Mechanical 29 "1" at 4094.25,1351.69 h19.68
C7: Mechanical 29 "1" at 4099.25,1061.69 h19.68
CP1: Mechanical 29 "+" at 2510.95,3694.06 h19.68 r270; Mechanical 29 "-" at 2510.95,3591.69 h19.68 r270; Top Overlay "+" at 2510.95,3694.06 h19.68 r270; Top Overlay "-" at 2510.95,3591.69 h19.68 r270
CP2: Mechanical 29 "+" at 2300.94,3689.06 h19.68 r270; Mechanical 29 "-" at 2300.94,3586.69 h19.68 r270; Top Overlay "+" at 2300.94,3689.06 h19.68 r270; Top Overlay "-" at 2300.94,3586.69 h19.68 r270
CP3: Mechanical 29 "+" at 3730.95,3594.06 h19.68 r270; Mechanical 29 "-" at 3730.95,3491.69 h19.68 r270; Top Overlay "+" at 3730.95,3594.06 h19.68 r270; Top Overlay "-" at 3730.95,3491.69 h19.68 r270
CP4: Mechanical 29 "+" at 3975.94,3594.06 h19.68 r270; Mechanical 29 "-" at 3975.94,3491.69 h19.68 r270; Top Overlay "+" at 3975.94,3594.06 h19.68 r270; Top Overlay "-" at 3975.94,3491.69 h19.68 r270
R1: Mechanical 29 "1" at 4715,2090 h19.68 r90
R2: Mechanical 29 "1" at 4610,3290 h19.68 r90
R5: Mechanical 29 "1" at 1655,2750 h19.68 r180
R6: Mechanical 29 "1" at 1685,2045 h19.68 r180
U3: Mechanical 29 "1" at 4043.54,4035.12 h19.68 r180